# EAGLE board cartridge (EAGLE 9.6.2)
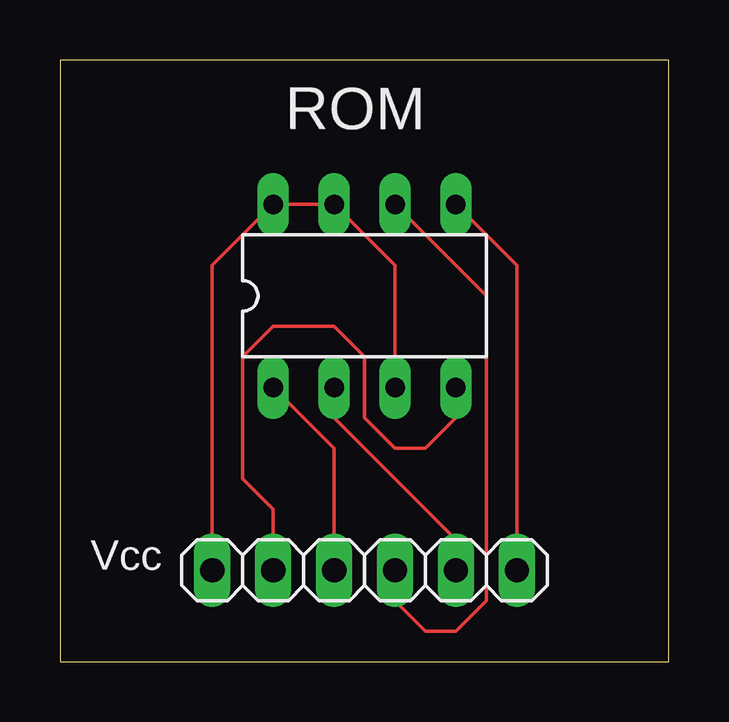
[diagram p0: board, top side]

Size 25.38 x 25.07 mm. Coordinates in mm from the lower left corner, seen from the top.
Outline: 0,0 25.38,0 25.38,25.07 0,25.07 0,0
Copper layers (1*16): Top 0.035mm / dielectric 1.5mm / Bottom 0.035mm
Design rules "default": minimum track width 6mil, minimum drill 0.35mm, track to track 6mil, track to pad 6mil, pad to pad 6mil, via to via 6mil, smd to smd 6mil, copper to edge 40mil, drill to drill 6mil, minimum pad ring 10mil, minimum via ring 8mil, stop-mask expansion 4mil, vias tented up to drill 0mil, thermal gap 10mil

## Footprints (pad centres in the part's own frame; a part is rotated, then mirrored left to right if it is on the bottom)
DIL8 = drill 0.813 long: 1 -3.81,-3.81; 2 -1.27,-3.81; 3 1.27,-3.81; 4 3.81,-3.81; 5 3.81,3.81; 6 1.27,3.81; 7 -1.27,3.81; 8 -3.81,3.81
1X06 = drill 1.016 long: 1 -6.35,0; 2 -3.81,0; 3 -1.27,0; 4 1.27,0; 5 3.81,0; 6 6.35,0

## Placement (x,y rotation side)
ROM  25LC040P  [DIL8]  12.7,15.24 0 top
SPI  [1X06]  12.7,3.81 180 top

## Library data of the parts
ROM = microchip; MF: MICROCHIP; MPN: 25LC040/P; OC_FARNELL: 9758100; OC_NEWARK: 96K4091
SPI = pinhead

## Nets
N$1: ROM.4 SPI.5
N$2: ROM.3 ROM.7 ROM.8 SPI.6
N$3: ROM.1 SPI.4
N$4: ROM.2 SPI.2
N$5: ROM.6 SPI.3
N$6: ROM.5 SPI.1

## Tracks (layer width: path | path; a pad name or v marks a point on that pad's centre or on a via)
N$1
  Top 0.152: ROM.4 16.51,10.16 15.24,8.89 13.97,8.89 12.7,10.16 12.7,12.7 11.43,13.97 8.89,13.97 7.62,12.7 7.62,7.62 8.89,6.35 SPI.5
N$2
  Top 0.152: ROM.3 13.97,16.51 ROM.7 ROM.8 6.35,16.51 SPI.6
N$3
  Top 0.152: ROM.1 11.43,8.89 SPI.4
N$4
  Top 0.152: ROM.2 11.43,10.16 16.51,5.08 SPI.2
N$5
  Top 0.152: ROM.6 17.78,15.24 17.78,2.54 16.51,1.27 15.24,1.27 13.97,2.54 SPI.3
N$6
  Top 0.152: ROM.5 19.05,16.51 SPI.1

## Text on the board
tNames: Vcc